# EAGLE board amp01 (EAGLE 6.1)
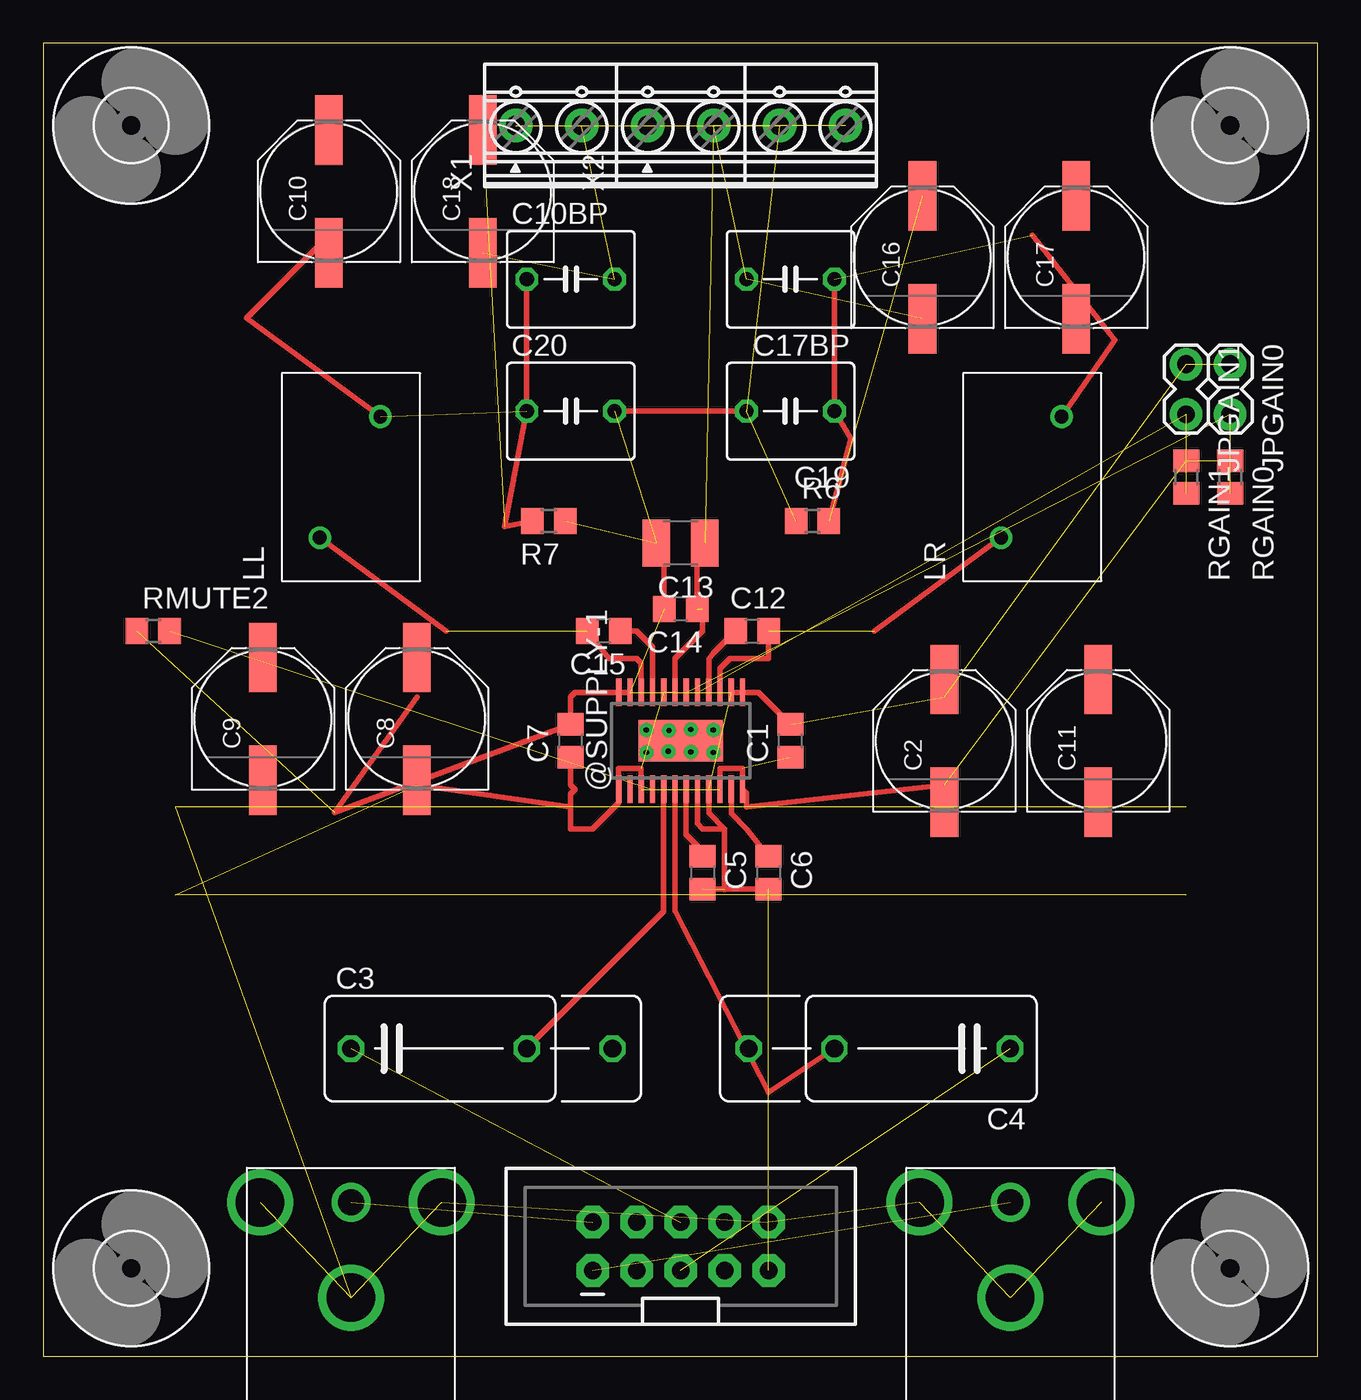
[diagram p0: board, top side]

Size 73.64 x 75.87 mm. Coordinates in mm from the lower left corner, seen from the top.
Outline: 0,0 73.64,0 73.64,75.87 0,75.87 0,0
Copper layers (1*16): Top 0.035mm / dielectric 1.5mm / Bottom 0.035mm
Design rules: minimum track width 10mil, minimum drill 24mil, track to track 8mil, track to pad 8mil, pad to pad 8mil, via to via 8mil, smd to smd 8mil, copper to edge 40mil, drill to drill 8mil, minimum pad ring 10mil, minimum via ring 8mil, stop-mask expansion 4mil, vias tented up to drill 0mil, thermal gap 10mil

## Footprints (pad centres in the part's own frame; a part is rotated, then mirrored left to right if it is on the bottom)
PWP-TSSOP24 = smd 1.6 x 0.3: 1 -2.8,3.575; 2 -2.8,2.925; 3 -2.8,2.275; 4 -2.8,1.625; 5 -2.8,0.975; 6 -2.8,0.325; 7 -2.8,-0.325; 8 -2.8,-0.975; 9 -2.8,-1.625; 10 -2.8,-2.275; 11 -2.8,-2.925; 12 -2.8,-3.575; 13 2.8,-3.575; 14 2.8,-2.925; 15 2.8,-2.275; 16 2.8,-1.625; 17 2.8,-0.975; 18 2.8,-0.325; 19 2.8,0.325; 20 2.8,0.975; 21 2.8,1.625; 22 2.8,2.275; 23 2.8,2.925; 24 2.8,3.575 | drill 0.3 pad 0.7: EXP@1 -0.665,1.98; EXP@2 0.635,1.98; EXP@3 -0.605,0.71; EXP@4 0.605,0.68; EXP@5 -0.635,-0.59; EXP@6 0.665,-0.59; EXP@7 -0.665,-1.89; EXP@8 0.635,-1.89 | smd 2.4 x 4.87: P$1 0,0
C0805 = smd 1.3 x 1.5: 1 -0.95,0; 2 0.95,0
PANASONIC_F = smd 4 x 1.6: + 3.55,0; - -3.55,0
C102_152-062X184 = drill 1.016 octagon: 1 -5.08,0; 2 5.08,0; 3 10.033,0
C050-055X075 = drill 0.813 octagon: 1 -2.54,0; 2 2.54,0
C1210 = smd 1.6 x 2.7: 1 -1.4,0; 2 1.4,0
4,1 = hole 4.1: 0,0
2X5-SHROUDED_LOCK = drill 1.016 pad 1.88 octagon: 1 -1.397,5.08; 2 1.397,5.08; 3 -1.397,2.54; 4 1.397,2.54; 5 -1.397,0; 6 1.397,0; 7 -1.397,-2.54; 8 1.397,-2.54; 9 -1.397,-5.08; 10 1.397,-5.08
1X02_LOCK = drill 1.016 pad 1.88: 1 -0.178,0; 2 2.718,0
NYS354 = drill 2.8: P$2 5.25,0; P$3 -5.25,0; P$4 0,5.5 | drill 1.5: SIG 0,0
1D10APAC = drill 0.8: P$1 -3.5,1.8; P$2 3.5,-1.7
R0805 = smd 1.3 x 1.5: 1 -0.95,0; 2 0.95,0
1727036 = drill 1.1 pad 1.93: 1 -5.715,0; 2 -1.905,0; 3 1.905,0; 4 5.715,0

## Placement (x,y rotation side)
@SUPPLY-1  TPA3123  [PWP-TSSOP24]  36.83,35.56 90 top
C1  .1uF  [C0805]  43.18,35.56 90 top
C2  220uF  [PANASONIC_F]  52.07,35.56 90 top
C3  1uF  [C102_152-062X184]  22.86,17.78 0 top
C4  1uF  [C102_152-062X184]  50.8,17.78 180 top
C5  1uF  [C0805]  38.1,27.94 270 top
C6  1uF  [C0805]  41.91,27.94 270 top
C7  .1uF  [C0805]  30.48,35.56 90 top
C8  220uF  [PANASONIC_F]  21.59,36.83 90 top
C9  220uF  [PANASONIC_F]  12.7,36.83 90 top
C10  220uF  [PANASONIC_F]  16.51,67.31 90 top
C10BP  0.68uF  [C050-055X075]  30.48,62.23 0 top
C11  220uF  [PANASONIC_F]  60.96,35.56 90 top
C12  .22uF  [C0805]  40.96,41.91 0 top
C13  10uF  [C1210]  36.83,46.99 180 top
C14  .1uF  [C0805]  36.83,43.18 180 top
C15  .22uF  [C0805]  32.38,41.91 180 top
C16  220uF  [PANASONIC_F]  50.8,63.5 90 top
C17  220uF  [PANASONIC_F]  59.69,63.5 90 top
C17BP  0.68uF  [C050-055X075]  43.18,62.23 180 top
C18  220uF  [PANASONIC_F]  25.4,67.31 90 top
C19  0.68uF  [C050-055X075]  43.18,54.61 180 top
C20  0.68uF  [C050-055X075]  30.48,54.61 0 top
H1  MOUNT-HOLE4.1  [4,1]  5.08,71.12 0 top
H2  MOUNT-HOLE4.1  [4,1]  5.08,5.08 0 top
H3  MOUNT-HOLE4.1  [4,1]  68.58,5.08 0 top
H4  MOUNT-HOLE4.1  [4,1]  68.58,71.12 0 top
JP3  M05X2SHD_LOCK  [2X5-SHROUDED_LOCK]  36.83,6.35 90 top
JPGAIN0  [1X02_LOCK]  68.58,57.15 270 top
JPGAIN1  [1X02_LOCK]  66.04,57.15 270 top
LIN  RCA-NYS354  [NYS354]  17.78,8.89 180 top
LL  1D10A  [1D10APAC]  17.78,50.8 90 top
LR  1D10A  [1D10APAC]  57.15,50.8 90 top
R6  4K7  [R0805]  44.45,48.26 0 top
R7  4K7  [R0805]  29.21,48.26 180 top
RGAIN0  10K  [R0805]  68.58,50.8 270 top
RGAIN1  10K  [R0805]  66.04,50.8 270 top
RIN  RCA-NYS354  [NYS354]  55.88,8.89 180 top
RMUTE2  10K  [R0805]  6.35,41.91 0 top
X1  1727036  [1727036]  33.02,71.12 0 top
X2  1727036  [1727036]  40.64,71.12 0 top

## Library data of the parts
@SUPPLY-1 = texas
C1-C10 C10BP C11-C17 C17BP C18-C20 R6 R7 RGAIN0 RGAIN1 RMUTE2 = rcl
H1-H4 = holes
JP3 = SparkFun-Connectors
JPGAIN0 JPGAIN1 = SparkFun-Passives
LIN LL LR RIN = wes
X1 X2 = con-phoenix-3.81; MF: FARNELL; MPN: 1727036; OC_FARNELL: 3704592; OC_NEWARK: 71C4114

## Nets
GND: @SUPPLY-1.8 @SUPPLY-1.9 @SUPPLY-1.13 @SUPPLY-1.14 @SUPPLY-1.23 @SUPPLY-1.24 C1.2 C5.2 C6.2 C7.2 C13.2 C14.2 C19.2 C20.2 JP3.9 JP3.10 JPGAIN0.1 JPGAIN1.1 LIN.P$2 LIN.P$3 LIN.P$4 R6.1 R7.1 RIN.P$2 RIN.P$3 RIN.P$4 RMUTE2.1 X1.1 X1.3 X2.1 X2.3
LIN: JP3.2 LIN.SIG
N$1: @SUPPLY-1.6 C4.2
N$2: @SUPPLY-1.5 C3.2
N$3: C3.1 JP3.6
N$4: C4.1 JP3.5
N$5: @SUPPLY-1.11 C6.1
N$6: @SUPPLY-1.4 RMUTE2.2
N$7: @SUPPLY-1.18 JPGAIN0.2 RGAIN0.2
N$8: @SUPPLY-1.17 JPGAIN1.2 RGAIN1.2
N$9: @SUPPLY-1.7 C5.1
N$10: @SUPPLY-1.15 C12.2 LR.P$1
N$11: @SUPPLY-1.16 C12.1
N$12: @SUPPLY-1.22 C15.2 LL.P$1
N$13: @SUPPLY-1.21 C15.1
N$14: C10BP.1 C18.+ C20.1 LL.P$2 R7.2
N$15: C16.- C17BP.2 X1.4
N$16: C10BP.2 C18.- X1.2
N$17: C16.+ C17BP.1 C19.1 LR.P$2 R6.2
N$18: @SUPPLY-1.2
RIN: JP3.1 RIN.SIG
VCC: @SUPPLY-1.1 @SUPPLY-1.3 @SUPPLY-1.10 @SUPPLY-1.12 @SUPPLY-1.19 @SUPPLY-1.20 C1.1 C7.1 C13.1 C14.1 RGAIN0.1 RGAIN1.1 X2.2 X2.4

## Tracks (layer width: path | path; a pad name or v marks a point on that pad's centre or on a via)
GND  (24 unrouted)
  Top 0.305: @SUPPLY-1.14 @SUPPLY-1.13 41.33,38.36 C1.2 | C5.2 C6.2 | @SUPPLY-1.9 38.45,31.39 39.37,30.48 | @SUPPLY-1.8 37.8,30.77 38.1,30.48 39.37,30.48 | 39.37,30.48 39.37,26.99 | 21.59,38.1 16.83,31.43 C7.2 30.48,38.1 30.74,38.36 @SUPPLY-1.24 @SUPPLY-1.23 | C14.2 35.88,46.54 C13.2 | C19.2 C20.2
LIN  (1 unrouted)
N$1
  Top 0.305: @SUPPLY-1.6 36.51,25.73 41.91,15.24 C4.2
N$2
  Top 0.305: @SUPPLY-1.5 35.85,25.7 C3.2
N$3  (1 unrouted)
N$4  (1 unrouted)
N$5
  Top 0.305: C6.1 40.64,30.48 39.76,31.36 @SUPPLY-1.11
N$6  (1 unrouted)
N$7  (2 unrouted)
N$8  (2 unrouted)
N$9
  Top 0.305: C5.1 38.1,29.21 37.16,30.16 @SUPPLY-1.7
N$10  (1 unrouted)
  Top 0.305: C12.2 41.91,40.32 40.64,40.32 39.69,40.32 39.1,39.74 @SUPPLY-1.15 | 48.04,41.91 LR.P$1
N$11
  Top 0.305: C12.1 39.69,41.59 38.73,40.64 38.45,40.28 @SUPPLY-1.16
N$12  (1 unrouted)
  Top 0.305: C15.2 32.7,40.32 34.29,40.32 34.55,40.06 @SUPPLY-1.22 | 23.29,41.91 LL.P$1
N$13
  Top 0.305: C15.1 34.29,41.91 35.2,40.99 @SUPPLY-1.21
N$14  (2 unrouted)
  Top 0.305: LL.P$2 11.74,60 16.51,64.77 | C10BP.1 C20.1 26.67,47.94 R7.2
N$15  (2 unrouted)
N$16  (2 unrouted)
N$17  (2 unrouted)
  Top 0.305: LR.P$2 61.92,58.73 57.15,64.77 | R6.2 46.67,53.02 C19.1 C17BP.1
RIN  (1 unrouted)
VCC  (11 unrouted)
  Top 0.305: C7.1 30.48,33.02 30.74,32.76 30.48,32.5 30.48,31.75 | 30.48,31.75 30.48,30.48 31.75,30.48 33.26,31.98 @SUPPLY-1.1 33.26,33.97 34.55,33.97 @SUPPLY-1.3 | @SUPPLY-1.10 39.1,33.97 40.41,33.97 @SUPPLY-1.12 40.64,32.52 40.64,31.75 52.07,33.02 | 21.59,33.02 30.48,31.75 | @SUPPLY-1.19 36.51,40.31 38.1,41.91 38.1,43.18 | C14.1 37.78,46.54 C13.1